# Altium PCB PCB3.PcbDoc
Units mil, origin at the board's own origin, x right, y up, seen from the top; angles counter-clockwise.
Board outline 6000 x 4000 mil, 2 copper layers (Top Layer, Bottom Layer); 9 components, 8 nets, 24 pads, 0 vias.
Unrouted connection lines stored in the file: 14.
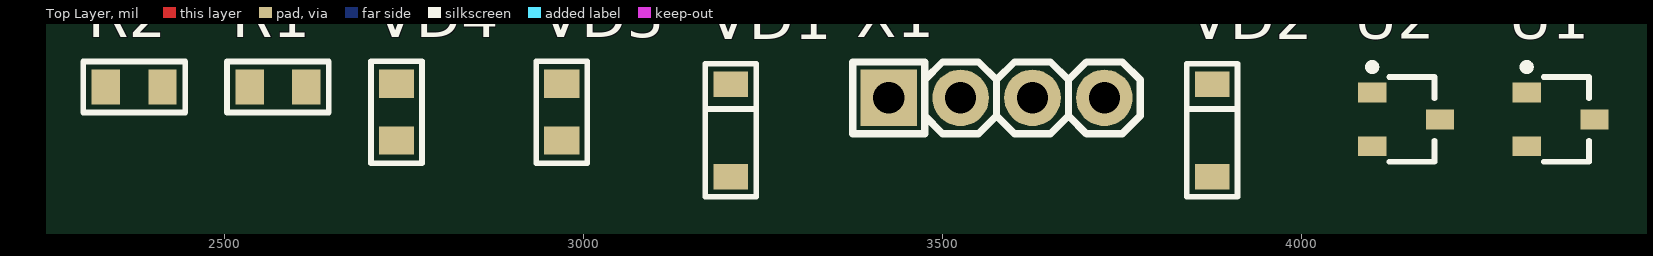
[diagram p0: Top Layer view]
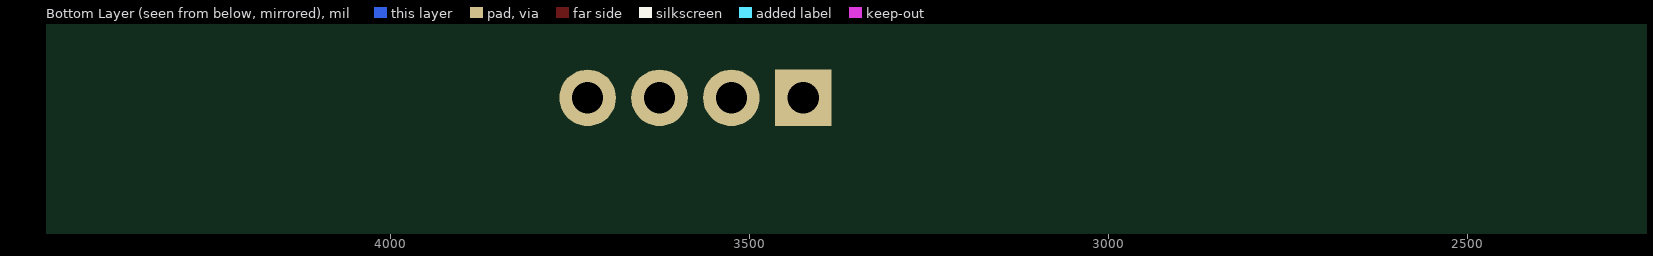
[diagram p1: Bottom Layer view, seen from below]

## Layer stack, top to bottom
Top Solder: solder mask 0.4, Solder Resist, Dk 3.5
Top Layer: signal copper 1.4
Dielectric 1: dielectric 12.6, FR-4, Dk 4.8
Bottom Layer: signal copper 1.4
Bottom Solder: solder mask 0.4, Solder Resist, Dk 3.5

## Board outline
1000,1000 7000,1000 7000,5000 1000,5000

## Design rules (kind name [scope] priority, off if disabled: settings)
Clearance [All] p1: gap=10 ignorepadtopadclearanceinfootprint=FALSE except(0: Arc-Hole Track-Hole SMDPad-Hole THPad-Hole Via-Hole Fill-Hole Poly-Hole Region-Hole Text-Hole)
PolygonConnect [All] p1: connectstyle=Relief reliefconductorwidth=10 reliefentries=4 polygonreliefangle="90 Angle" airgapwidth=10
RoomDefinition Sheet1 [InComponentClass('Sheet1')] p1: confinementstyle=ConfineIn formatcopy=TRUE lockcomponents=FALSE outline 4635,1460 6790,1460 6790,1915 4635,1915
RoutingVias [All] p1: holewidth=28 width=50 viastyle="Through Hole" minholewidth=28 minwidth=50 maxholewidth=28 maxwidth=50
SolderMaskExpansion [All] p1: expansion=4
Width [All] p1: maxlimit=10 minlimit=10 preferedwidth=10
30 further rules are at their usual default settings.

## Components (designator, comment, footprint, x,y, rotation, side; value= is the part's Value field where it differs from the comment)
R1 "1k" CH0805R 2575,2205 r0 top
R2 "1k" CH0805R 2375,2205 r0 top
U1 "Hal" A1103ELHLT-T 4360,2160 r0 top
U2 "Hal" A1103ELHLT-T 4145,2160 r0 top
VD1 "*" SOD123 3205,2080 r90 top
VD2 "*" SOD123 3875,2080 r90 top
VD3 "*" CH0805LB 2970,2170 r90 top
VD4 "*" CH0805LR 2740,2170 r90 top
X1 "*" "CON: PLS-4(90)" 3575,2190 r0 top

## Footprints (in the part's own frame and the unit in brackets; to place one, negate y for a bottom-side part, rotate by r counter-clockwise, add the part's x,y. Pads: shape width x height; smd on the part's side, far side on the other; paste and mask are expansions set on the pad)
A1103ELHLT-T [mm] "Hall Sensor SOT23"
  rect 1x0.7 smd: 1(-1.2,0.95) 2(-1.2,-0.95) 3(1.2,0)
  silkscreen extent -1.32,-1.5 1,1.97, body extent -1.45,-1.5 1.45,1.5, height 1
CH0805LB [mm]
  rect 1x1.25 smd: 1(-1,0) 2(1,0)
  silkscreen extent -1.8,-0.9 1.8,0.9, body extent -1.05,-0.67 1.05,0.68, height 0.8
CH0805LR [mm]
  rect 1x1.25 smd: 1(-1,0) 2(1,0)
  silkscreen extent -1.8,-0.9 1.8,0.9, body extent -1.05,-0.67 1.05,0.68, height 0.9
CH0805R [mm]
  rect 1x1.25 smd: 1(-1,0) 2(1,0)
  silkscreen extent -1.8,-0.9 1.8,0.9, body extent -1,-0.6 1,0.6, height 0.44
"CON: PLS-4(90)" [mm] "PLS-40 4 pin header"
  rect 2x2 hole 1.1: 1(-3.81,0)
  round 2 hole 1.1: 2(-1.27,0) 3(1.27,0) 4(3.81,0)
  silkscreen extent -5.08,-1.27 5.08,1.27, body extent -5.08,-7.32 5.08,1.3, height 5.5
SOD123 [mm]
  rect 0.91x1.22 smd: 1(0,0) 2(3.275,0)
  round 0.5 on Mech1: 4(3,0.4)
  silkscreen extent -0.7,-0.9 4,0.9, body extent -0.25,-0.8 3.45,0.8, height 1.25

## Part data
R1 R2: library part Resistor
VD1 VD2: library part Diod
VD3 VD4: library part LED
X1: library part 4-Connector

## Nets (pads, with @x,y where several pads share a name; then routed paths per layer and width w, separated by ;. In a path a pad name is that pad's centre, name@x,y a point inside that pad or via, vN(x,y) a via of type N, cw(c..) or ccw(c..) an arc to the next point about the centre after c; other vN are vias at no path point)
GND: U1.3 U2.3 X1.1
NetR1_1: R1.1 R2.1 U1.1 U2.1 X1.4
NetR1_2: R1.2 VD4.1
NetR2_2: R2.2 VD3.1
NetU1_2: U1.2 VD1.2 VD4.2
NetU2_2: U2.2 VD2.2 VD3.2
NetVD1_1: VD1.1 X1.3
NetVD2_1: VD2.1 X1.2
pads on no net: VD1.4 VD2.4